# Altium PCB mipi-lcd-type-1080p.PcbDoc
Units mil, origin at the board's own origin, x right, y up, seen from the top; angles counter-clockwise.
Board outline 1102.36 x 1240.16 mil, 2 copper layers (Top Layer, Bottom Layer); 2 components, 17 nets, 61 pads, 196 vias.
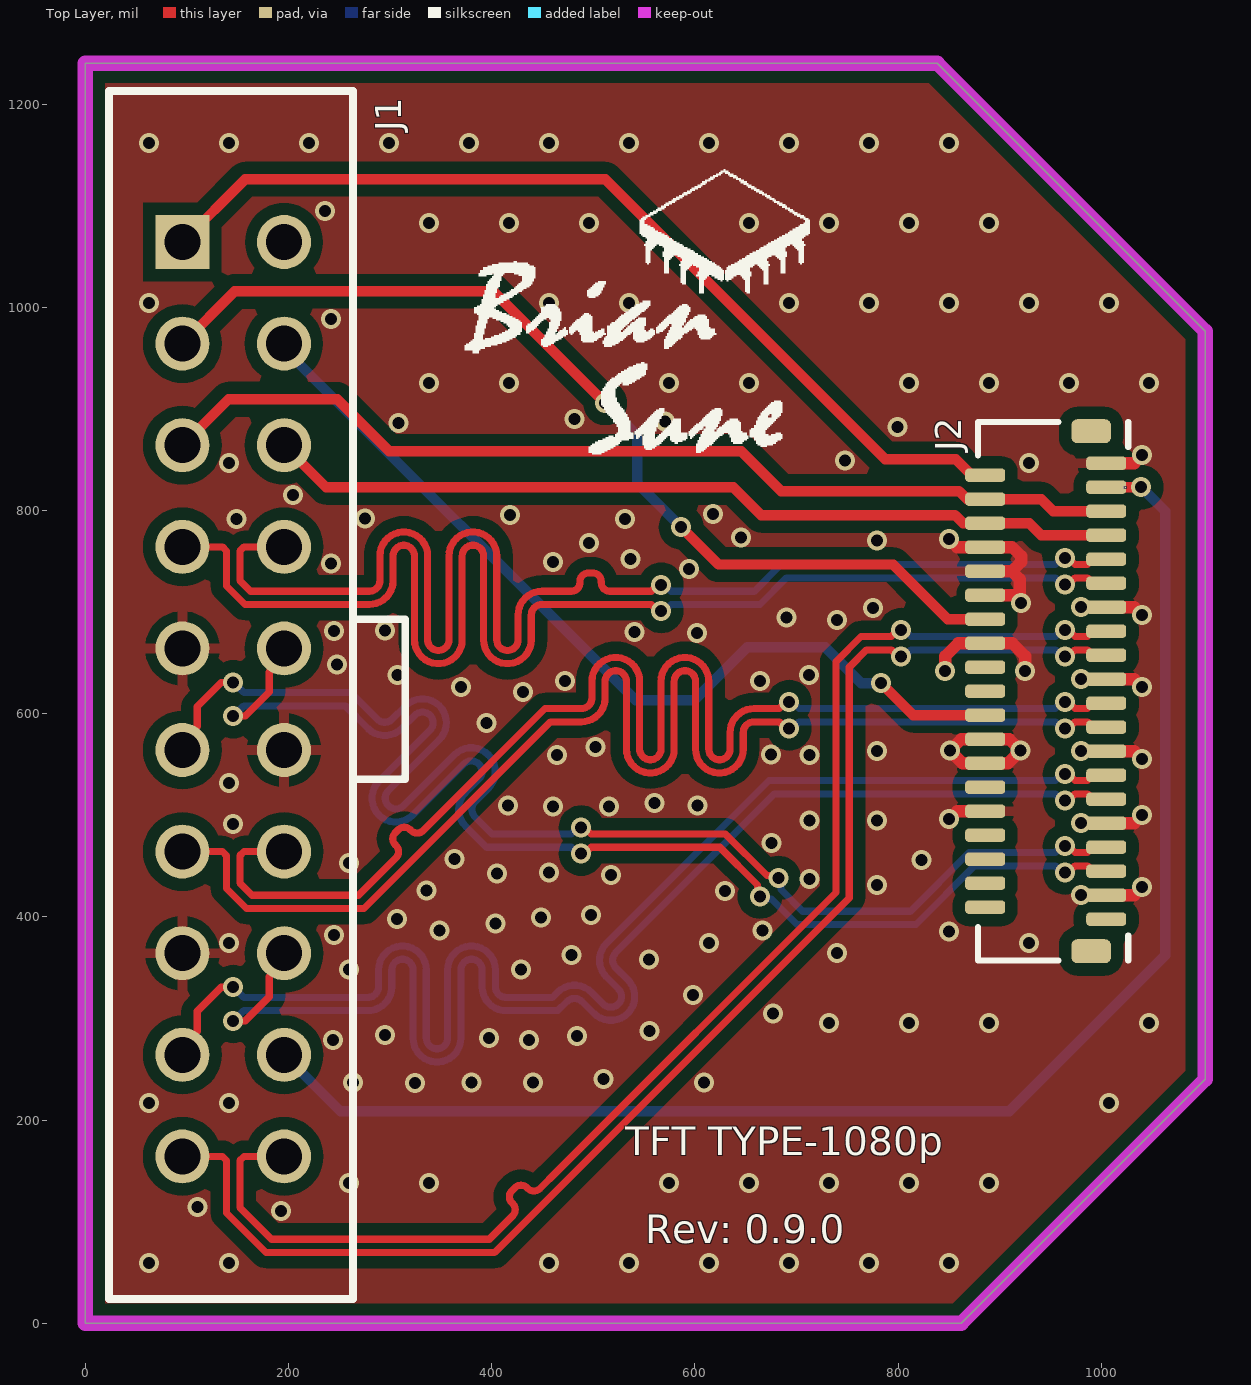
[diagram p0: Top Layer view]
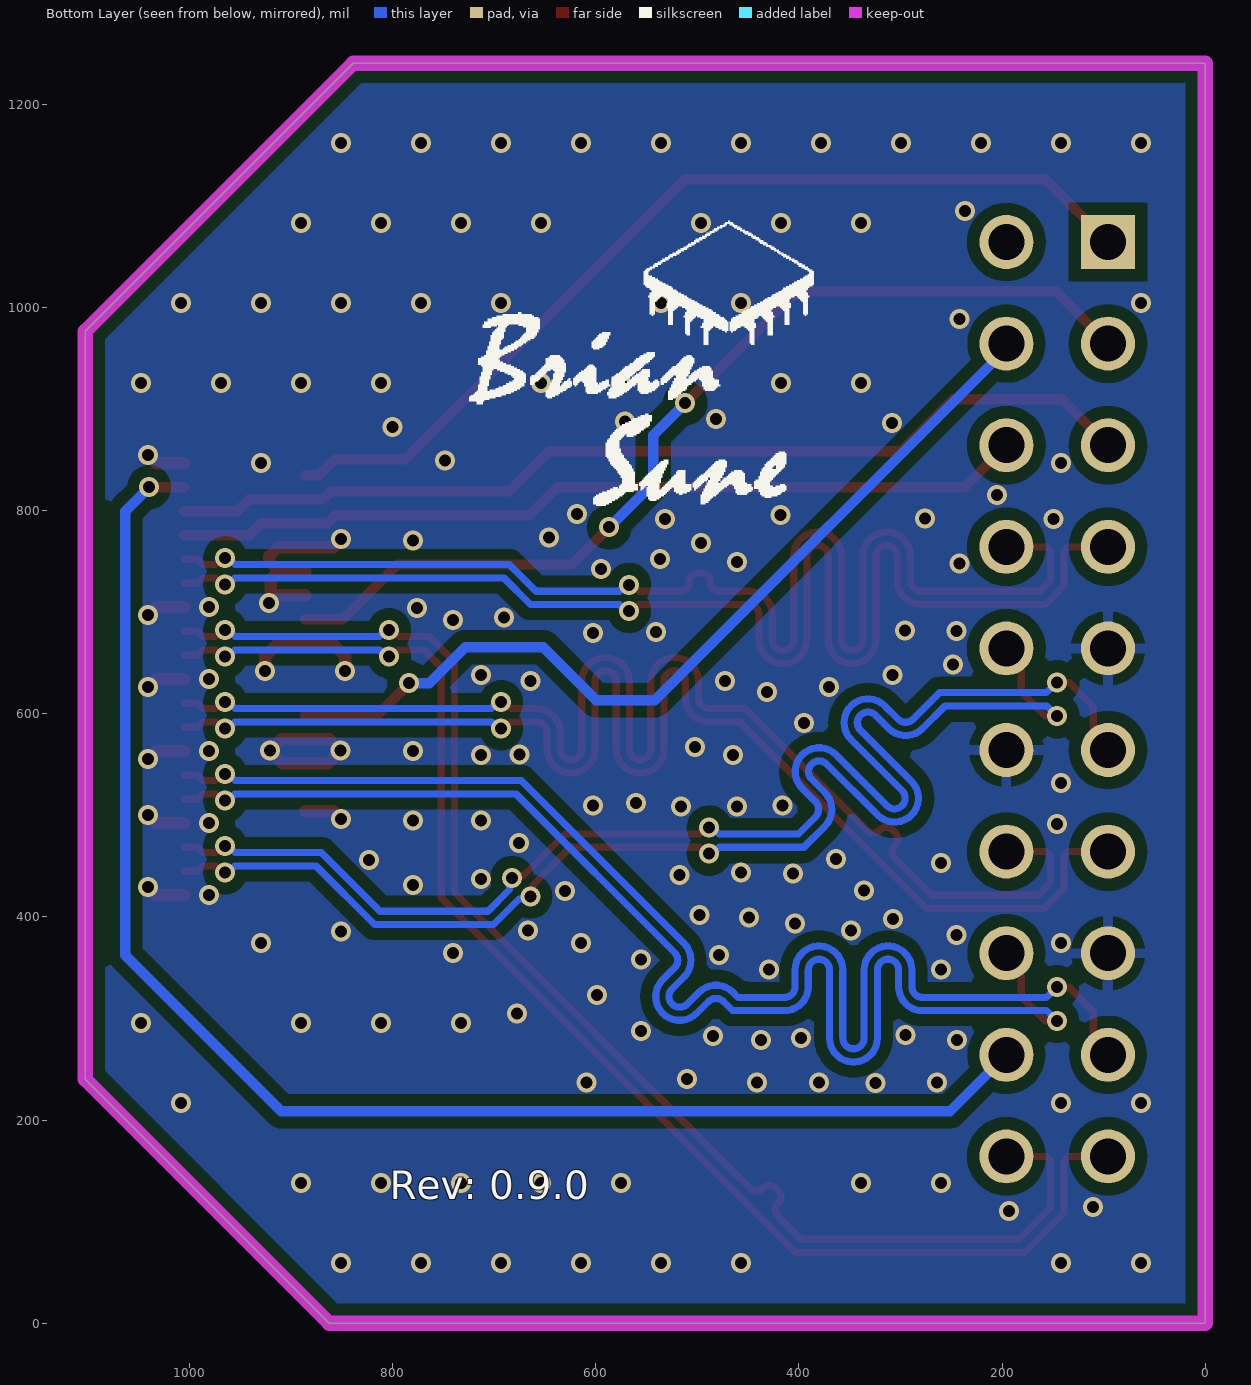
[diagram p1: Bottom Layer view, seen from below]

## Layer stack, top to bottom
Top Solder: solder mask 0.4, Solder Resist, Dk 3.5
Top Layer: signal copper 1.4
Dielectric 1: dielectric 12.6, FR-4, Dk 4.8
Bottom Layer: signal copper 1.4
Bottom Solder: solder mask 0.4, Solder Resist, Dk 3.5

## Board outline
0,0 0,1240.16 838.58,1240.16 1102.36,976.38 1102.36,240.16 862.2,0

## Design rules (kind name [scope] priority, off if disabled: settings)
Clearance [All] p1: gap=6 ignorepadtopadclearanceinfootprint=FALSE except(0: Arc-Hole Track-Hole SMDPad-Hole THPad-Hole Via-Hole Fill-Hole Poly-Hole Region-Hole Text-Hole; 8: Arc-THPad Track-THPad; 10: SMDPad-THPad; 12: Arc-Poly Track-Poly SMDPad-Poly THPad-THPad THPad-Poly Via-Poly Fill-Poly Poly-Poly)
ComponentClearance [All] p1: gap=7.87 collisioncheckmode=3 verticalgap=7.87 showdistances=FALSE
DiffPairsRouting [All] p1: maxlimit=10 minlimit=6 mostfreqgap=8 toplayer_minwidth=6 toplayer_maxwidth=15 toplayer_prefwidth=7 bottomlayer_minwidth=6 bottomlayer_maxwidth=15 bottomlayer_prefwidth=7 maxuncoupledlength=500
HoleSize [All] p1: absolutevalues=TRUE maxlimit=157.48 minlimit=3.94 maxpercent=80.000 minpercent=20.000
HoleToHoleClearance [All] p1: gap=6 allowstackedmicrovias=TRUE
MatchedLengths MatchedLengths_1 [InNetClass('MIPI_SIG')] p1: tolerance=3 checknetsindiffpair=TRUE checkdiffpairvsdiffpair=FALSE checkxsignals=FALSE checkothers=FALSE
MatchedLengths [InNetClass('MIPI_SIG')] p2: tolerance=3 checknetsindiffpair=FALSE checkdiffpairvsdiffpair=TRUE checkxsignals=TRUE checkothers=TRUE
MinimumSolderMaskSliver [All] p1: minsoldermaskwidth=3
PlaneConnect [All] p1: pad.planeconnectstyle=Relief pad.reliefexpansion=20 pad.reliefentries=4 pad.reliefconductorwidth=10 pad.reliefairgap=10 via.planeconnectstyle=Direct via.reliefexpansion=20 via.reliefentries=4 via.reliefconductorwidth=10 via.reliefairgap=10
PolygonConnect [All] p1: thpad.connectstyle=Relief thpad.reliefconductorwidth=10 thpad.reliefentries=4 thpad.polygonreliefangle="90 Angle" thpad.airgapwidth=10 smdpad.connectstyle=Relief smdpad.reliefconductorwidth=10 smdpad.reliefentries=4 smdpad.polygonreliefangle="90 Angle" smdpad.airgapwidth=8 via.connectstyle=Direct via.reliefconductorwidth=10 via.reliefentries=4 via.polygonreliefangle="90 Angle" via.airgapwidth=10
RoutingVias [All] p1: holewidth=11.81 width=19.68 viastyle="Through Hole" minholewidth=11.81 minwidth=19.68 maxholewidth=59.06 maxwidth=47.24
SilkToSilkClearance [All] p1: silktosilkclearance=6
SilkToSolderMaskClearance [IsPad] p1: minsilkscreentomaskgap=0 clearancetoexposedcopper=TRUE
SolderMaskExpansion [All] p1: expansion=1
Width [All] p1: maxlimit=40 minlimit=6 preferedwidth=6
22 further rules are at their usual default settings.

## Classes and differential pairs
net class MIPI_SIG: MIPI_CLK_N MIPI_CLK_P MIPI_D0_N MIPI_D0_P MIPI_D1_N MIPI_D1_P MIPI_D2_N MIPI_D2_P MIPI_D3_N MIPI_D3_P
differential pair MIPI_D2: +MIPI_D2_P -MIPI_D2_N
differential pair MIPI_D3: +MIPI_D3_P -MIPI_D3_N
differential pair MIPI_D1: +MIPI_D1_P -MIPI_D1_N
differential pair MIPI_D0: +MIPI_D0_P -MIPI_D0_N
differential pair MIPI_CLK: +MIPI_CLK_P -MIPI_CLK_N

## Components (designator, comment, footprint, x,y, rotation, side; value= is the part's Value field where it differs from the comment)
J1 "MIPI_TESTER" 20IN 145.67,614.17 r270 top
J2 "FH26W-39S-0.3SHW(60)" CONN39_FH26W-39S-0.3SHW(60)_HIR 952.61,622.05 r90 top

## Footprints (in the part's own frame and the unit in brackets; to place one, negate y for a bottom-side part, rotate by r counter-clockwise, add the part's x,y. Pads: shape width x height; smd on the part's side, far side on the other; paste and mask are expansions set on the pad)
20IN [mm]
  rect 1.35x1.35 hole 0.9: 1(-11.43,-1.27)
  round 1.35 hole 0.9: 2(-11.43,1.27) 3(-8.89,-1.27) 4(-8.89,1.27) 5(-6.35,-1.27) 6(-6.35,1.27) 7(-3.81,-1.27) 8(-3.81,1.27) 9(-1.27,-1.27) 10(-1.27,1.27) 11(1.27,-1.27) 12(1.27,1.27) 13(3.81,-1.27) 14(3.81,1.27) 15(6.35,-1.27) 16(6.35,1.27) 17(8.89,-1.27) 18(8.89,1.27) 19(11.43,-1.27) 20(11.43,1.27)
  silkscreen extent -15.2,-3.1 15,4.3, body extent -15.09,-3 14.89,4.2, height 2.52
CONN39_FH26W-39S-0.3SHW(60)_HIR [mm]
  rrect50% 0.33x1 smd: 1(5.7,-1.329) 2(5.4,1.696) 3(5.1,-1.329) 4(4.8,1.696) 5(4.5,-1.329) 6(4.2,1.696) 7(3.9,-1.329) 8(3.6,1.696) 9(3.3,-1.329) 10(3,1.696) 11(2.7,-1.329) 12(2.4,1.696) 13(2.1,-1.329) 14(1.8,1.696) 15(1.5,-1.329) 16(1.2,1.696) 17(0.9,-1.329) 18(0.6,1.696) 19(0.3,-1.329) 20(0,1.696) 21(-0.3,-1.329) 22(-0.6,1.696) 23(-0.9,-1.329) 24(-1.2,1.696) 25(-1.5,-1.329) 26(-1.8,1.696) 27(-2.1,-1.329) 28(-2.4,1.696) 29(-2.7,-1.329) 30(-3,1.696) 31(-3.3,-1.329) 32(-3.6,1.696) 33(-3.9,-1.329) 34(-4.2,1.696) 35(-4.5,-1.329) 36(-4.8,1.696) 37(-5.1,-1.329) 38(-5.4,1.696) 39(-5.7,-1.329)
  rrect50% 0.6x0.991 smd: 40(-6.5,-0.953) 41(6.5,-0.952)
  silkscreen extent -6.73,-1.88 6.73,1.88, body extent -6.6,-1.75 6.6,1.75, height 1

## Part data
J1: library part 20P_MIPI
J2: "No Description Available", Mfr_Name=Hirose, Copyright="Copyright (C) 2022 Ultra Librarian. All rights reserved.", Manufacturer_Part_Number=FH26W-39S-0.3SHW(60), RefDes=RefDes, Type=DEV

## Via types
v1: diameter 19.68, hole 11.81, Top Layer to Bottom Layer, tented both sides, 196 vias

## Nets (pads, with @x,y where several pads share a name; then routed paths per layer and width w, separated by ;. In a path a pad name is that pad's centre, name@x,y a point inside that pad or via, vN(x,y) a via of type N, cw(c..) or ccw(c..) an arc to the next point about the centre after c; other vN are vias at no path point)
GND: J1.9 J1.12 J1.15 J2.1 J2.8 J2.10 J2.12 J2.13 J2.16 J2.19 J2.24 J2.25 J2.26 J2.30 J2.31 J2.37 | length 743.1
  Top Layer w12: v1(846.46,641.73) 846.46,656.45 859.3,669.29 J2.16 912.35,669.29 925.2,656.45 v1(925.2,641.73) ; v1(850.39,496.06) 858.27,503.94 J2.30 ; v1(850.39,771.65) 858.27,763.78 J2.8 912.34,763.78 921.26,754.86 921.26,749.48 911.94,740.16 ; J2.12 913.39,716.54 v1@919.79,710.13 ; J2.10 911.94,740.16 ; v1(921.26,708.66) v1@919.79,710.13 ; J2.37 1032.5,421.26 v1(1040.37,429.13) ; J2.31 1032.5,492.13 v1(1040.37,500) ; J2.25 1032.5,562.99 v1(1040.37,555.12) ; J2.19 1032.5,633.86 v1(1040.37,625.98) ; J2.13 1032.5,704.72 v1(1040.37,696.85) ; J2.1 1032.5,846.46 v1(1040.37,854.33) ; 911.94,740.16 919.79,732.31 v1@919.79,710.13 ; v1(850.98,563.58) 862.2,574.8 J2.24 909.45,574.8 v1(920.67,563.58) 908.27,551.18 J2.26 863.39,551.18 v1(850.98,563.58)
  other v1: 63,59.06 141.74,59.06 456.7,59.06 535.44,59.06 614.18,59.06 692.92,59.06 771.66,59.06 850.4,59.06 192.91,110.24 110.46,114.17 259.85,137.8 338.59,137.8 574.81,137.8 653.55,137.8 732.29,137.8 811.03,137.8 889.77,137.8 63,216.54 141.74,216.54 1007.88,216.54 263.78,236.84 324.54,236.22 380.21,236.84 440.94,236.84 608.83,236.84 509.87,240.16 244.09,278.97 437.01,278.97 397.64,280.62 484.25,282.81 294.83,283.46 555.39,287.4 732.29,295.28 811.03,295.28 889.77,295.28 1047.25,295.28 677.17,304.94 598.43,322.83 259.84,348.04 429.13,347.97 555.12,357.84 478.55,362.2 740.16,364.17 141.74,374.02 614.18,374.02 929.14,374.02 244.64,381.89 850.39,385.48 348.58,386.49 666.55,386.48 403.71,393.25 307.09,397.65 448.82,399.48 497.76,401.57 980.31,421.26 335.71,426.12 629.92,425.2 779.53,431.42 712.73,437.08 517.3,441.32 405.51,442.64 456.69,443.85 259.85,452.76 822.97,455.91 363.36,456.69 675.51,472.44 145.67,491.51 980.31,492.13 712.73,494.84 779.53,494.84 460.63,508.82 515.75,508.68 416.15,509.34 602.67,509.34 560.16,511.81 141.74,531.5 464.57,559.06 712.73,559.06 675.17,559.57 980.31,562.99 779.53,563.44 502,566.93 395,590.55 431.1,621.21 370.09,625.98 472.44,632.11 664.17,632.22 980.31,633.86 307.6,637.8 712.6,637.8 248.03,648.27 602.36,679.56 540.8,680.29 244.64,681.14 295.28,681.61 740.16,692.2 690.35,694.52 775.59,703.77 980.31,704.72 594.49,742.31 241.69,747.65 460.63,749.38 536.81,751.97 496.07,767.72 779.53,770.59 645.67,773.52 149.1,791.34 531.5,791.51 275.59,792.14 417.96,795.28 618.11,796.34 204.72,814.96 141.74,846.46 929.14,846.46 748.03,849.38 799.72,881.89 308.46,885.83 570.87,887.71 481.55,889.76 338.59,925.2 417.33,925.2 574.81,925.2 653.55,925.2 811.03,925.2 889.77,925.2 968.51,925.2 1047.25,925.2 241.69,988.19 63,1003.94 456.7,1003.94 535.44,1003.94 692.92,1003.94 771.66,1003.94 850.4,1003.94 929.14,1003.94 1007.88,1003.94 338.59,1082.68 417.33,1082.68 496.07,1082.68 653.55,1082.68 732.29,1082.68 811.03,1082.68 889.77,1082.68 236.22,1094.49 63,1161.42 141.74,1161.42 220.48,1161.42 299.22,1161.42 377.96,1161.42 456.7,1161.42 535.44,1161.42 614.18,1161.42 692.92,1161.42 771.66,1161.42 850.4,1161.42
LED_A: J1.1 J2.2 | length 936.4
  Top Layer w10: J1.1 157.48,1125.98 511.81,1125.98 787.4,850.39 856.89,850.39 872.64,834.65 J2.2
LED_K: J1.18 J2.3 | length 1458.8
  Top Layer w10: J2.3 v1(1039.37,822.83)
  Bottom Layer w10: J1.18 251.18,208.66 909.45,208.66 1062.99,362.2 1062.99,799.21 v1(1039.37,822.83)
MIPI_CLK_N: J1.13 J2.23 | length 1370
  Top Layer w7: J1.13 135.07,464.17 139.17,460.07 139.17,427.76 158.67,408.26 274.4,408.26 458.07,591.93 488.19,591.93 ccw(c488.19,615.43) 511.69,615.43 511.69,631.78 cw(c522.19,631.78) 532.69,631.78 532.69,565.07 ccw(c556.19,565.07) 579.69,565.07 579.69,631.78 cw(c590.19,631.78) 600.69,631.78 600.69,565.07 ccw(c624.19,565.07) 647.69,565.07 647.69,581.43 cw(c658.19,581.43) 658.19,591.93 683.14,591.93 689.48,585.58 v1(692.91,585.58) ; v1(964.57,585.58) 968,585.58 974.34,591.93 986.44,591.93 991.75,586.61 J2.23
  Bottom Layer w7: v1(692.91,585.58) 696.35,585.58 702.69,591.93 954.79,591.93 961.13,585.58 v1(964.57,585.58)
MIPI_CLK_P: J1.14 J2.21 | length 1370
  Top Layer w7: J1.14 156.27,464.17 152.17,460.07 152.17,433.14 164.05,421.26 269.02,421.26 304.45,456.69 305.93,458.18 ccw(c300,464.12) 305.93,470.06 305.1,470.89 cw(c311.04,476.83) 305.1,482.77 308.07,485.74 cw(c314.01,479.8) 319.95,485.74 320.78,484.91 ccw(c326.72,490.85) 332.66,484.91 346.46,498.7 452.68,604.93 488.19,604.93 ccw(c488.19,615.43) 498.69,615.43 498.69,631.78 cw(c522.19,631.78) 545.69,631.78 545.69,565.07 ccw(c556.19,565.07) 566.69,565.07 566.69,631.78 cw(c590.19,631.78) 613.69,631.78 613.69,565.07 ccw(c624.19,565.07) 634.69,565.07 634.69,581.43 cw(c658.19,581.43) 658.19,604.93 683.14,604.93 689.48,611.27 v1(692.91,611.27) ; v1(964.57,611.27) 968,611.27 974.34,604.93 986.44,604.93 991.75,610.24 J2.21
  Bottom Layer w7: v1(692.91,611.27) 696.35,611.27 702.69,604.93 954.79,604.93 961.13,611.27 v1(964.57,611.27)
MIPI_D0_N: J1.19 J2.17 | length 1370
  Top Layer w7: J1.19 135.07,164.17 139.17,160.07 139.17,108.53 178.02,69.68 403.02,69.68 751.97,418.62 751.97,645.67 769.09,662.79 793.37,662.79 799.72,656.45 v1(803.15,656.45) ; v1(964.57,656.45) 968,656.45 974.34,662.79 986.44,662.79 991.75,657.48 J2.17
  Bottom Layer w7: v1(803.15,656.45) 806.58,656.45 812.92,662.79 954.79,662.79 961.13,656.45 v1(964.57,656.45)
MIPI_D0_P: J1.20 J2.15 | length 1370
  Top Layer w7: J1.20 156.27,164.17 152.17,160.07 152.17,113.91 183.41,82.68 397.64,82.68 419.29,104.33 420.78,105.82 ccw(c414.84,111.76) 420.78,117.69 419.94,118.53 cw(c425.88,124.47) 419.94,130.41 422.91,133.38 cw(c428.85,127.44) 434.79,133.38 435.63,132.54 ccw(c441.57,138.48) 447.5,132.54 464.57,149.61 738.97,424.01 738.97,651.05 763.71,675.79 793.37,675.79 799.72,682.13 v1(803.15,682.13) ; v1(964.57,682.13) 968,682.13 974.34,675.79 986.44,675.79 991.75,681.1 J2.15
  Bottom Layer w7: v1(803.15,682.13) 806.58,682.13 812.92,675.79 954.79,675.79 961.13,682.13 v1(964.57,682.13)
MIPI_D1_N: J1.16 J2.29 | length 1370.3
  Top Layer w7: v1(145.67,297.64) 157.48,297.64 181.1,321.26 181.1,341.15 195.67,355.72 J1.16 ; v1(964.57,514.72) 968,514.72 974.34,521.06 986.44,521.06 991.75,515.75 J2.29
  Bottom Layer w7: v1(145.67,297.64) 146.08,297.64 156.11,307.67 278.21,307.67 ccw(c278.21,331.17) 301.71,331.17 301.71,347.73 cw(c312.21,347.73) 322.71,347.73 322.71,280.62 ccw(c346.21,280.62) 369.71,280.62 369.71,347.73 cw(c380.21,347.73) 390.71,347.73 390.71,331.17 ccw(c414.21,331.17) 414.21,307.67 465.15,307.67 474.13,316.65 cw(c481.55,309.22) 488.98,316.65 500.68,304.94 ccw(c517.3,321.56) 533.92,304.94 ccw(c517.3,321.56) 540.8,321.56 ccw(c517.3,321.56) 533.92,338.18 522.21,349.88 cw(c529.64,357.31) 522.21,364.73 678.54,521.06 954.79,521.06 961.13,514.72 v1(964.57,514.72)
MIPI_D1_P: J1.17 J2.27 | length 1370.3
  Top Layer w7: J1.17 95.67,272.63 110.24,287.2 110.24,307.09 133.86,330.71 v1(145.67,330.71) ; v1(964.57,540.4) 968,540.4 974.34,534.06 986.44,534.06 991.75,539.37 J2.27
  Bottom Layer w7: v1(145.67,330.71) 146.08,330.71 156.11,320.67 278.21,320.67 ccw(c278.21,331.17) 288.71,331.17 288.71,347.73 cw(c312.21,347.73) 335.71,347.73 335.71,280.62 ccw(c346.21,280.62) 356.71,280.62 356.71,347.73 cw(c380.21,347.73) 403.71,347.73 403.71,331.17 ccw(c414.21,331.17) 414.21,320.67 459.77,320.67 464.94,325.84 cw(c481.55,309.22) 498.17,325.84 509.87,314.14 ccw(c517.3,321.56) 524.72,314.14 ; 524.74,314.16 ccw(c517.3,321.56) 527.8,321.56 ccw(c517.3,321.56) 524.72,328.98 513.02,340.69 cw(c529.64,357.31) 513.02,373.92 673.15,534.06 954.79,534.06 961.13,540.4 v1(964.57,540.4)
MIPI_D2_N: J1.10 J2.35 | length 1345.2
  Top Layer w7: v1(145.67,597.64) 157.48,597.64 181.1,621.26 181.1,641.15 195.67,655.72 J1.10 ; v1(488.19,462.16) 491.62,462.16 497.96,468.5 624.61,468.5 661.69,431.42 661.69,422.45 v1(664.12,420.03) ; v1(964.57,443.85) 968,443.85 974.34,450.19 986.44,450.19 991.75,444.88 J2.35
  Bottom Layer w7: v1(145.67,597.64) 146.08,597.64 156.11,607.67 255.91,607.67 278.21,585.37 ccw(c294.83,601.99) 311.44,585.37 324.54,598.46 cw(c331.96,591.04) 339.37,598.48 ; 339.39,598.46 cw(c331.96,591.04) 342.46,591.04 cw(c331.96,591.04) 339.39,583.61 289.16,533.39 ccw(c305.77,516.77) 289.16,500.15 ccw(c305.77,516.77) 322.39,500.15 372.62,550.38 cw(c380.04,542.96) 387.47,550.38 ; 387.49,550.36 cw(c380.04,542.96) 390.54,542.96 cw(c380.04,542.96) 387.47,535.53 374.38,522.44 ccw(c390.99,505.82) 374.38,489.2 395.07,468.5 478.41,468.5 484.76,462.16 v1(488.19,462.16) ; v1(664.12,420.03) 666.55,417.6 675.52,417.6 700.6,392.51 817.71,392.51 875.39,450.19 954.79,450.19 961.13,443.85 v1(964.57,443.85)
MIPI_D2_P: J1.11 J2.33 | length 1345.3
  Top Layer w7: J1.11 95.67,572.63 110.24,587.2 110.24,607.09 133.86,630.71 v1(145.67,630.71) ; v1(488.19,487.85) 491.62,487.85 497.96,481.5 630,481.5 670.88,440.61 679.85,440.61 v1(682.28,438.19) ; v1(964.57,469.54) 968,469.54 974.34,463.19 986.44,463.19 991.75,468.5 J2.33
  Bottom Layer w7: v1(145.67,630.71) 146.08,630.71 156.11,620.67 261.29,620.67 287.4,594.56 ccw(c294.83,601.99) 302.25,594.56 315.34,607.66 cw(c331.96,591.04) 348.58,607.66 cw(c331.96,591.04) 355.46,591.04 cw(c331.96,591.04) 348.58,574.42 298.35,524.19 ccw(c305.77,516.77) 298.35,509.34 ccw(c305.77,516.77) 313.2,509.34 363.43,559.57 cw(c380.04,542.96) 396.66,559.57 cw(c380.04,542.96) 403.54,542.96 cw(c380.04,542.96) 396.66,526.34 383.57,513.24 ccw(c390.99,505.82) 383.57,498.4 400.46,481.5 478.41,481.5 484.76,487.85 v1(488.19,487.85) ; v1(682.28,438.19) 684.71,435.76 684.71,426.79 705.99,405.51 812.32,405.51 870,463.19 954.79,463.19 961.13,469.54 v1(964.57,469.54)
MIPI_D3_N: J1.7 J2.11 | length 1370
  Top Layer w7: J1.7 135.07,764.17 139.17,760.07 139.17,725.6 157.3,707.47 279.53,707.47 ccw(c279.53,730.97) 303.03,730.97 303.03,755.28 cw(c313.53,755.28) 324.03,755.28 324.03,672.67 ccw(c347.53,672.67) 371.03,672.67 371.03,755.28 cw(c381.53,755.28) 392.03,755.28 392.03,672.67 ccw(c415.53,672.67) 439.03,672.67 439.03,696.97 cw(c449.53,696.97) 449.53,707.47 557.15,707.47 563.5,701.13 v1(566.93,701.13) ; v1(964.57,727.32) 968,727.32 974.34,733.66 986.44,733.66 991.75,728.35 J2.11
  Bottom Layer w7: v1(566.93,701.13) 570.36,701.13 576.7,707.47 664.17,707.47 690.35,733.66 954.79,733.66 961.13,727.32 v1(964.57,727.32)
MIPI_D3_P: J1.8 J2.9 | length 1370
  Top Layer w7: J1.8 156.27,764.17 152.17,760.07 152.17,730.98 162.68,720.47 279.53,720.47 ccw(c279.53,730.97) 290.03,730.97 290.03,755.28 cw(c313.53,755.28) 337.03,755.28 337.03,672.67 ccw(c347.53,672.67) 358.03,672.67 358.03,755.28 cw(c381.53,755.28) 405.03,755.28 405.03,672.67 ccw(c415.53,672.67) 426.03,672.67 426.03,696.97 cw(c449.53,696.97) 449.53,720.47 476.38,720.47 478.48,720.47 ccw(c478.48,728.87) 486.88,728.87 486.88,730.05 cw(c495.28,730.05) 495.28,738.45 499.48,738.45 cw(c499.48,730.05) 507.88,730.05 507.88,728.87 ccw(c516.28,728.87) 516.28,720.47 523.62,720.47 557.15,720.47 563.5,726.82 v1(566.93,726.82) ; v1(964.57,753) 968,753 974.34,746.66 986.44,746.66 991.75,751.97 J2.9
  Bottom Layer w7: v1(566.93,726.82) 570.36,726.82 576.7,720.47 658.78,720.47 684.97,746.66 954.79,746.66 961.13,753 v1(964.57,753)
MIPI_RST: J1.4 J2.22 | length 887.8
  Top Layer w10: v1(783.46,629.92) 814.96,598.43 J2.22
  Bottom Layer w10: J1.4 195.67,959.25 541.79,613.13 599.34,613.13 651.57,665.35 728.35,665.35 763.78,629.92 v1(783.46,629.92)
VIO: J1.3 J2.14 | length 972.9
  Top Layer w10: J1.3 147.24,1015.75 401.57,1015.75 v1(511.81,905.51) ; v1(586.61,783.46) 623.42,746.66 795.28,746.66 849.02,692.91 J2.14
  Bottom Layer w10: v1(511.81,905.51) 543.31,874.02 543.31,826.77 v1(586.61,783.46)
VSN_ANALOG: J1.6 J2.6 J2.7 | length 846
  Top Layer w10: J1.6 237.01,822.83 637.8,822.83 665.35,795.28 856.25,795.28 864.12,787.4 J2.6 929.13,787.4 940.94,775.59 J2.7
VSP_ANALOG: J1.5 J2.4 J2.5 | length 973.7
  Top Layer w10: J1.5 140.94,909.45 248.03,909.45 299.21,858.27 645.67,858.27 685.04,818.9 860.18,818.9 868.06,811.02 J2.4 940.94,811.02 952.76,799.21 J2.5
pads on no net: J1.2 J2.18 J2.20 J2.28 J2.32 J2.34 J2.36 J2.38 J2.39 J2.40 J2.41

## Polygon pours and split planes (outlines as drawn)
GND on Top Layer "GND_L01_P010" (solid, remove dead copper, pour order 10): 0,1240.16 838.58,1240.16 1102.36,976.38 1102.36,240.16 862.2,0 0,0
GND on Bottom Layer "GND_L02_P014" (solid, remove dead copper, pour order 14): 0,1240.16 838.58,1240.16 1102.36,976.38 1102.36,240.16 862.2,0 0,0

## Keep-outs
Keep-Out Layer:
  the board outline again, w15

## Silkscreen, mask and mechanical layers (free items; w line width, h text height)
Top Overlay:
  drawing of 11 lines, arcs and shapes, not listed
  text "TFT TYPE-1080p" at 531.5,165.35 h28
  text "Rev: 0.9.0" at 551.18,78.74 h28
Bottom Overlay:
  drawing of 11 lines, arcs and shapes, not listed
  text "Rev: 0.9.0" at 802.85,122.05 h28